# EAGLE board Tempura_V2_Gerber (EAGLE 9.6.1), part 1 of 2
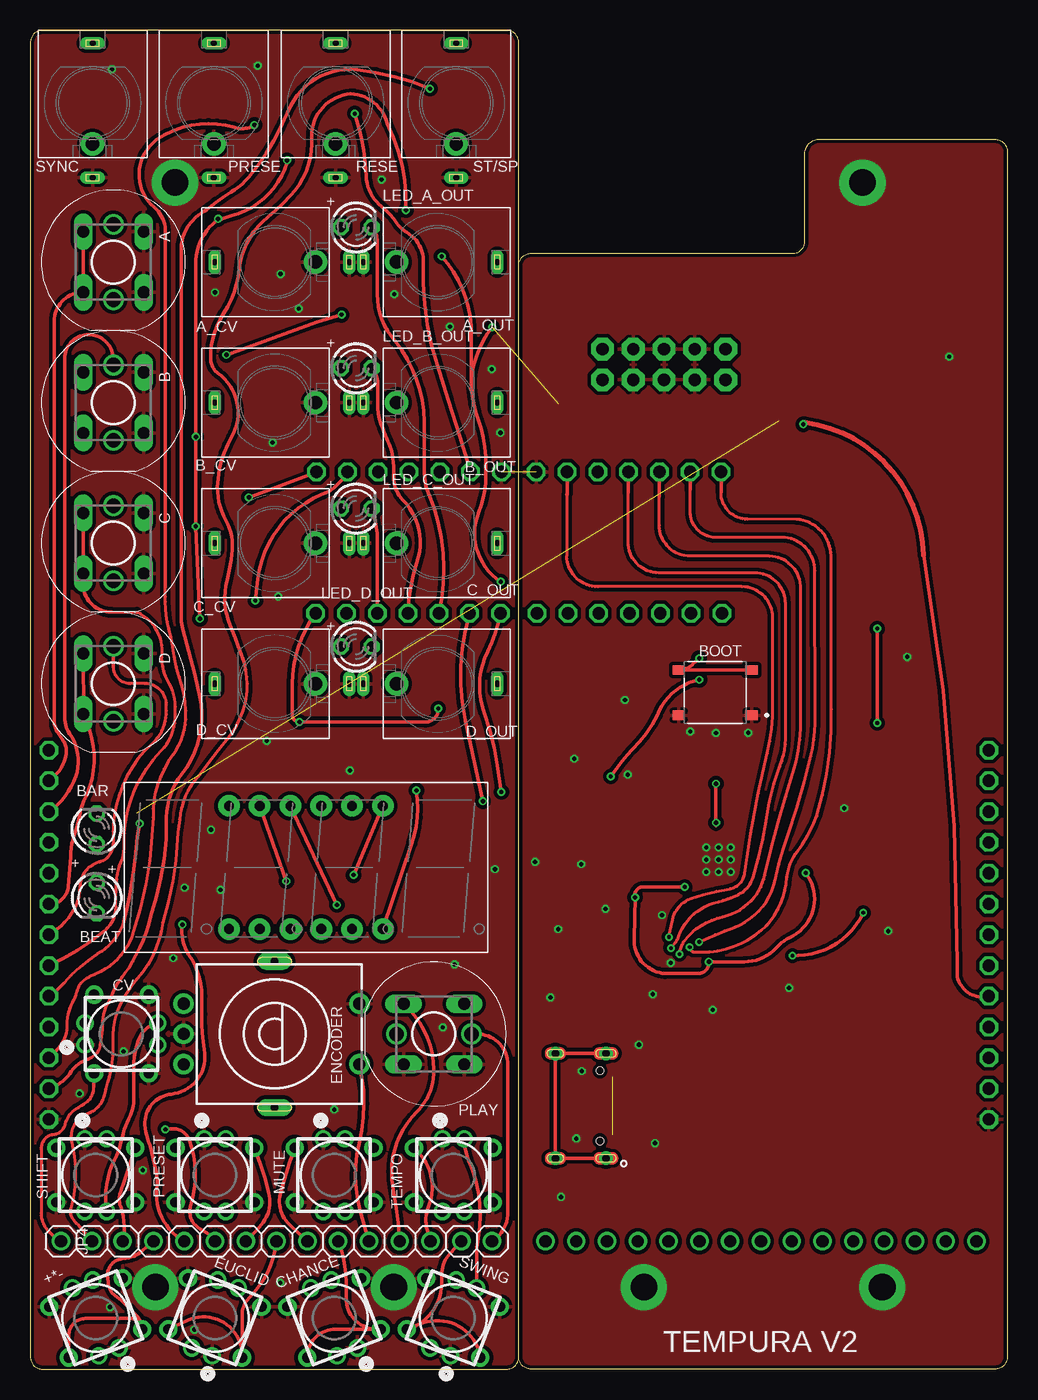
[diagram p0: board, top side]
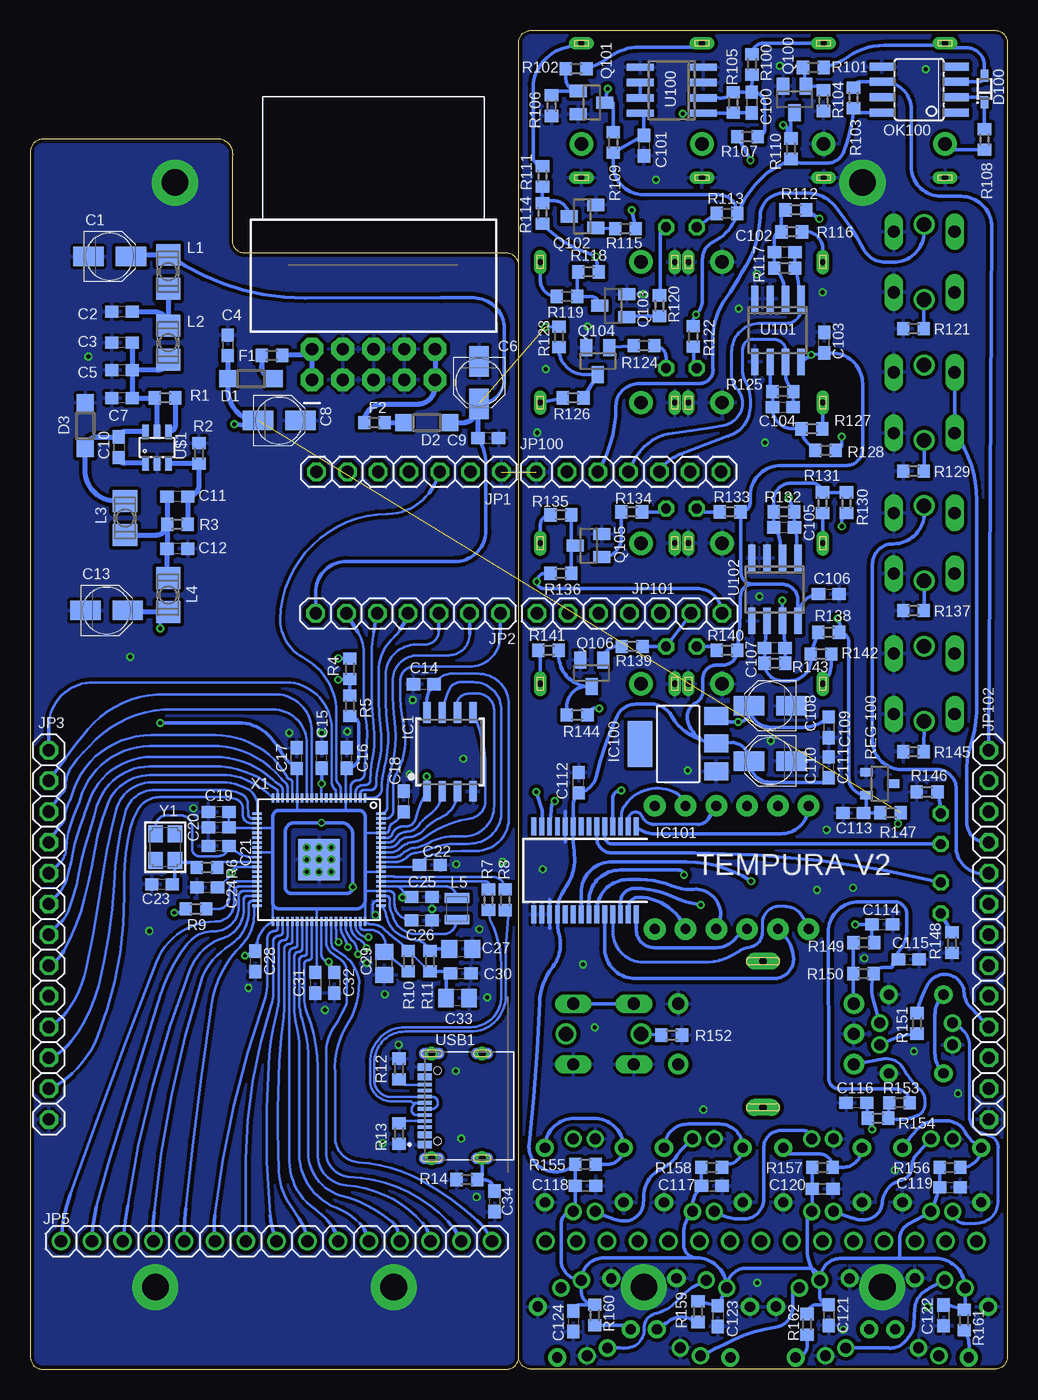
[diagram p1: board, bottom side, seen from below]

Size 80.6 x 110.5 mm. Coordinates in mm from the lower left corner, seen from the top.
Outline: 40.3,1 arc-90 39.3,0 1,0 arc-90 0,1 0,109.5 arc-90 1,110.5 39.3,110.5 arc-90 40.3,109.5 40.3,1
Outline: 40.3,1 arc90 41.3,0 79.6,0 arc90 80.6,1 80.6,100.5 arc90 79.6,101.5 64.9,101.5 arc90 63.9,99.99 63.9,93.09 arc-90 62.9,92.09 41.3,92.09 arc90 40.3,91.09 40.3,36.21 40.3,1
Copper layers (1*16): Top 0.035mm / dielectric 1.5mm / Bottom 0.035mm
Design rules "Covered_Vias": minimum track width 6mil, minimum drill 12mil, track to track 6mil, track to pad 6mil, pad to pad 6mil, via to via 6mil, smd to smd 0mil, copper to edge 10mil, drill to drill 10mil, minimum pad ring 10mil, minimum via ring 6mil, stop-mask expansion 2mil, vias tented up to drill 100mil, thermal gap 10mil

## Footprints (pad centres in the part's own frame; a part is rotated, then mirrored left to right if it is on the bottom)
BUTTON_PIXEL_ç = drill 0.85 pad 1.5: 1 -2.25,-3.25; 2 2.25,-3.25; 3 -2.25,3.25; 4 2.25,3.25 | drill 0.9 pad 1.422: DIN 3,-0.9; DOUT -3,0.9; GND -3,-0.9; VDD 3,0.9
TIMEBUTTON_HOLES_LEDS = drill 1 long: 1 -2.5,2.5; 2 2.5,2.5; 3 -2.5,-2.5; 4 2.5,-2.5 | drill 1.2: P$1 -3.1,0; P$2 3.1,0
NOHOLER_GND_SHORT_PADMINI_GND = drill 0.5 pad 1.016 long: P1 0,-6.15; P3 0,4.92 | drill 1.1 pad 1.93: P2 0,-3.38
LED3MM = drill 0.813 octagon: A -1.27,0; K 1.27,0
SW_TS-1187A-B-A-B = smd 1 x 0.75: A -3,1.875; B 3,1.875; C -3,-1.875; D 3,-1.875
PANASONIC_B = smd 2.5 x 1.6: + 1.75,0; - -1.75,0
C0603 = smd 1.1 x 1: 1 -0.85,0; 2 0.85,0
0603 = smd 1.1 x 1: 1 -0.85,0; 2 0.85,0
C0805 = smd 1.3 x 1.5: 1 -0.95,0; 2 0.95,0
SOD123 = smd 1.4 x 1.4: A 1.9,0; C -1.9,0
SOD323F = smd 1 x 0.6: A 1.1,0; C -1.1,0
CI-11 = drill 1 pad 1.676: A -2.5,-7.5; B 0,-7.5; C 2.5,-7.5; D -2.5,7; E 2.5,7 | drill 0.6 pad 1.422 long: C1 -6,0; C2 6.065,0
R0603 = smd 1 x 1.1: 1 -0.85,0; 2 0.85,0
SOIC-8 = smd 0.61 x 1.702: 1 -1.905,-3.251; 2 -0.635,-3.251; 3 0.635,-3.251; 4 1.905,-3.251; 5 1.905,3.251; 6 0.635,3.251; 7 -0.635,3.251; 8 -1.905,3.251
SOT223 = smd 1.499 x 2.007: 1 -2.261,-3.15; 2 0.025,-3.15; 3 2.311,-3.15 | smd 3.81 x 2.007: 4 0,3.15
SSOP28 = smd 0.4 x 1.5: 1 -4.225,-3.625; 2 -3.575,-3.625; 3 -2.925,-3.625; 4 -2.275,-3.625; 5 -1.625,-3.625; 6 -0.975,-3.625; 7 -0.325,-3.625; 8 0.325,-3.625; 9 0.975,-3.625; 10 1.625,-3.625; 11 2.275,-3.625; 12 2.925,-3.625; 13 3.575,-3.625; 14 4.225,-3.625; 15 4.225,3.625; 16 3.575,3.625; 17 2.925,3.625; 18 2.275,3.625; 19 1.625,3.625; 20 0.975,3.625; 21 0.325,3.625; 22 -0.325,3.625; 23 -0.975,3.625; 24 -1.625,3.625; 25 -2.275,3.625; 26 -2.925,3.625; 27 -3.575,3.625; 28 -4.225,3.625
1X07ç = drill 1.016 octagon: 1 -7.62,0; 2 -5.08,0; 3 -2.54,0; 4 0,0; 5 2.54,0; 6 5.08,0; 7 7.62,0
1X13ç = drill 1.016 octagon: 1 -13.97,0; 2 -11.43,0; 3 -8.89,0; 4 -6.35,0; 5 -3.81,0; 6 -1.27,0; 7 1.27,0; 8 3.81,0; 9 6.35,0; 10 8.89,0; 11 11.43,0; 12 13.97,0; 13 16.51,0
1X15ç = drill 1.016: 1 -17.78,0; 2 -15.24,0; 3 -12.7,0; 4 -10.16,0; 5 -7.62,0; 6 -5.08,0; 7 -2.54,0; 8 0,0; 9 2.54,0; 10 5.08,0; 11 7.62,0; 12 10.16,0; 13 12.7,0; 14 15.24,0; 15 17.78,0
L3225P = smd 1.8 x 2: 1 -1.4,0; 2 1.4,0
1008(2520) = smd 0.8 x 2: 1 -0.9,0; 2 0.9,0
7-SEGMENT-4DIGIT-30MM = drill 0.8 pad 1.778: 1 -6.35,-5.08; 2 -3.81,-5.08; 3 -1.27,-5.08; 4 1.27,-5.08; 5 3.81,-5.08; 6 6.35,-5.08; 7 6.35,5.08; 8 3.81,5.08; 9 1.27,5.08; 10 -1.27,5.08; 11 -3.81,5.08; 12 -6.35,5.08
SOIC08 = smd 0.66 x 2.032: 1 -1.905,-3.073; 2 -0.635,-3.073; 3 0.635,-3.073; 4 1.905,-3.073; 5 1.905,3.073; 6 0.635,3.073; 7 -0.635,3.073; 8 -1.905,3.073
2X5-POWER_ACODADO = drill 1.016 pad 1.88 octagon: 1 -1.27,5.08; 2 1.27,5.08; 3 -1.27,2.54; 4 1.27,2.54; 5 -1.27,0; 6 1.27,0; 7 -1.27,-2.54; 8 1.27,-2.54; 9 -1.27,-5.08; 10 1.27,-5.08
SOT23 = smd 1 x 1.4: 1 -0.95,-1.1; 2 0.95,-1.1; 3 0,1.1
DBZ_R-PDSO-G3 = smd 0.7 x 1: 1 -0.95,-1.1; 2 0.95,-1.1; 3 0,1.1
SO08 = smd 0.6 x 2.2: 1 -1.905,-2.6; 2 -0.635,-2.6; 3 0.635,-2.6; 4 1.905,-2.6; 5 1.905,2.6; 6 0.635,2.6; 7 -0.635,2.6; 8 -1.905,2.6
SOT23-6 = smd 0.55 x 1.2: 1 -0.95,-1.3; 2 0,-1.3; 3 0.95,-1.3; 4 0.95,1.3; 5 0,1.3; 6 -0.95,1.3
HRO_TYPE-C-31-M-12 = smd 0.6 x 1.14: A1_B12 -3.2,4.75; A4_B9 -2.4,4.75; B1_A12 3.2,4.75; B4_A9 2.4,4.75 | smd 0.3 x 1.14: A5 -1.25,4.75; A6 -0.25,4.75; A7 0.25,4.75; A8 1.25,4.75; B5 1.75,4.75; B6 0.75,4.75; B7 -0.75,4.75; B8 -1.75,4.75 | drill 0.6 pad 0.9: S1 -4.325,4.17; S2 4.325,4.17; S3 -4.325,0; S4 4.325,0 | hole 0.6: -2.89,3.68; 2.89,3.68
QFN80 = smd 0.78 x 0.22: 1 -5.09,3.8; 2 -5.09,3.4; 3 -5.09,3; 4 -5.09,2.6; 5 -5.09,2.2; 6 -5.09,1.8; 7 -5.09,1.4; 8 -5.09,1; 9 -5.09,0.6; 10 -5.09,0.2; 11 -5.09,-0.2; 12 -5.09,-0.6; 13 -5.09,-1; 14 -5.09,-1.4; 15 -5.09,-1.8; 16 -5.09,-2.2; 17 -5.09,-2.6; 18 -5.09,-3; 19 -5.09,-3.4; 20 -5.09,-3.8; 41 5.1,-3.8; 42 5.1,-3.4; 43 5.1,-3; 44 5.1,-2.6; 45 5.1,-2.2; 46 5.1,-1.8; 47 5.1,-1.4; 48 5.1,-1; 49 5.1,-0.6; 50 5.1,-0.2; 51 5.1,0.2; 52 5.1,0.6; 53 5.1,1; 54 5.1,1.4; 55 5.1,1.8; 56 5.1,2.2; 57 5.1,2.6; 58 5.1,3; 59 5.1,3.4; 60 5.1,3.8 | smd 0.22 x 0.78: 21 -3.8,-5.1; 22 -3.4,-5.1; 23 -3,-5.1; 24 -2.6,-5.1; 25 -2.2,-5.1; 26 -1.8,-5.1; 27 -1.4,-5.1; 28 -1,-5.1; 29 -0.6,-5.1; 30 -0.2,-5.1; 31 0.2,-5.1; 32 0.6,-5.1; 33 1,-5.1; 34 1.4,-5.1; 35 1.8,-5.1; 36 2.2,-5.1; 37 2.6,-5.1; 38 3,-5.1; 39 3.4,-5.1; 40 3.8,-5.1; 61 3.8,5.1; 62 3.4,5.1; 63 3,5.1; 64 2.6,5.1; 65 2.2,5.1; 66 1.8,5.1; 67 1.4,5.1; 68 1,5.1; 69 0.6,5.1; 70 0.2,5.1; 71 -0.2,5.1; 72 -0.6,5.1; 73 -1,5.1; 74 -1.4,5.1; 75 -1.8,5.1; 76 -2.2,5.1; 77 -2.6,5.1; 78 -3,5.1; 79 -3.4,5.1; 80 -3.8,5.1 | smd 3.4 x 3.4: MNT 0,0
CRYSTAL_3.2X2.5 = smd 1.4 x 1.2: 1 -1.1,-0.8; 2 1.1,0.8; GND1 -1.1,0.8; GND2 1.1,-0.8

## Placement (x,y rotation side)
+*-  BUTTON_NEOPIXELBUTTON_PIXEL_ç  [BUTTON_PIXEL_ç]  5.4,4.23 111.1 top
A  DTS-6_LED  [TIMEBUTTON_HOLES_LEDS]  6.85,91.37 270 top
A_CV  OG-PJ301_PJ301_THONKICONNNOHOLER  [NOHOLER_GND_SHORT_PADMINI_GND]  20.15,91.37 90 top
A_OUT  OG-PJ301_PJ301_THONKICONNNOHOLER  [NOHOLER_GND_SHORT_PADMINI_GND]  33.6,91.37 270 top
B  DTS-6_LED  [TIMEBUTTON_HOLES_LEDS]  6.85,79.77 270 top
B_CV  OG-PJ301_PJ301_THONKICONNNOHOLER  [NOHOLER_GND_SHORT_PADMINI_GND]  20.15,79.77 90 top
B_OUT  OG-PJ301_PJ301_THONKICONNNOHOLER  [NOHOLER_GND_SHORT_PADMINI_GND]  33.6,79.77 270 top
BAR  OSG5TA7NE4B  [LED3MM]  5.48,44.6 90 top
BEAT  OSO5JA7NE4B  [LED3MM]  5.48,38.89 270 top
BOOT  TS-1187A-B-A-B  [SW_TS-1187A-B-A-B]  56.5,55.85 180 top
C  DTS-6_LED  [TIMEBUTTON_HOLES_LEDS]  6.85,68.17 270 top
C1  10uF  [PANASONIC_B]  74.05,91.84 0 bottom
C2  10n  [C0603]  73.04,87.27 180 bottom
C3  100n  [C0603]  73.04,84.73 180 bottom
C4  100n  [C0603]  64.32,84.5 270 bottom
C5  10uF  [C0603]  73.04,82.44 180 bottom
C6  10uF  [PANASONIC_B]  43.57,81.42 270 bottom
C7  100n  [C0603]  73.04,80.15 180 bottom
C8  10uF  [PANASONIC_B]  60.06,78.3 0 bottom
C9  100n  [C0603]  42.81,76.85 0 bottom
C10  100n  [C0603]  73.29,76.09 270 bottom
C11  100n  [C0603]  68.46,72.03 180 bottom
C12  22uF  [C0603]  68.46,67.71 180 bottom
C13  10uF  [PANASONIC_B]  74.31,62.63 0 bottom
C14  100n  [0603]  48.14,56.53 180 bottom
C15  100n  [0603]  56.55,50.44 90 bottom
C16  100n  [0603]  54.49,50.44 90 bottom
C17  100n  [0603]  58.63,50.43 90 bottom
C18  100n  [0603]  49.79,46.84 90 bottom
C19  100n  [0603]  65.06,45.99 180 bottom
C20  100n  [0603]  65.06,44.72 180 bottom
C21  15pF  [0603]  65.06,43.2 180 bottom
C22  100n  [C0603]  47.63,41.62 0 bottom
C23  15pF  [0603]  69.73,40.02 180 bottom
C24  4.7uF  [0603]  66,39.77 180 bottom
C25  4.7uF  [0603]  48.3,38.98 0 bottom
C26  4.7uF  [C0603]  48.3,37.02 180 bottom
C27  4.7uF  [C0805]  45.1,34.69 180 bottom
C28  100n  [0603]  62.04,33.66 270 bottom
C29  4.7uF  [C0805]  51.4,33.49 90 bottom
C30  100n  [0603]  45.1,32.66 0 bottom
C31  100n  [0603]  57.08,31.89 270 bottom
C32  100n  [0603]  55.51,31.89 270 bottom
C33  4.7uF  [C0805]  45.35,30.62 180 bottom
C34  10n  [C0603]  42.3,13.86 270 bottom
C100  100pF  [C0603]  21.08,104.54 270 bottom
C101  100n  [C0603]  29.97,100.98 270 bottom
C102  100pF  [C0603]  18.36,92.19 0 bottom
C103  100n  [C0603]  15.11,84.73 90 bottom
C104  100pF  [C0603]  18.52,79.39 0 bottom
C105  100pF  [C0603]  18.41,69.49 0 bottom
C106  100n  [C0603]  14.73,63.97 0 bottom
C107  100pF  [C0603]  19.18,59.53 0 bottom
C108  10uF  [PANASONIC_B]  19.56,54.75 180 bottom
C109  100n  [C0603]  14.73,52.98 270 bottom
C110  10uF  [PANASONIC_B]  19.56,50.18 180 bottom
C111  100n  [C0603]  14.73,49.67 90 bottom
C112  100n  [C0603]  35.36,48.4 90 bottom
C113  100nF  [C0603]  12.7,45.91 0 bottom
C114  100nF  [C0603]  10.31,36.69 180 bottom
C115  100n  [C0603]  8.13,33.82 0 bottom
C116  100nF  [C0603]  12.45,21.99 180 bottom
C117  100n  [C0603]  24.38,15.13 0 bottom
C118  100n  [C0603]  34.8,15.13 0 bottom
C119  100n  [C0603]  4.72,15 0 bottom
C120  100n  [C0603]  15.24,14.88 0 bottom
C121  100n  [C0603]  14.73,4.46 270 bottom
C122  100n  [C0603]  5.26,4.44 270 bottom
C123  100n  [C0603]  23.88,4.39 270 bottom
C124  100n  [C0603]  35.81,3.95 270 bottom
C_CV  OG-PJ301_PJ301_THONKICONNNOHOLER  [NOHOLER_GND_SHORT_PADMINI_GND]  20.15,68.17 90 top
C_OUT  OG-PJ301_PJ301_THONKICONNNOHOLER  [NOHOLER_GND_SHORT_PADMINI_GND]  33.6,68.17 270 top
CHANCE  BUTTON_NEOPIXELBUTTON_PIXEL_ç  [BUTTON_PIXEL_ç]  25.07,4.23 111.1 top
CV  BUTTON_NEOPIXELBUTTON_PIXEL_ç  [BUTTON_PIXEL_ç]  7.52,27.67 0 top
D  DTS-6_LED  [TIMEBUTTON_HOLES_LEDS]  6.85,56.57 270 top
D1  SS1040_R1_00001  [SOD123]  62.39,81.75 180 bottom
D2  SS1040_R1_00001  [SOD123]  47.89,78.12 180 bottom
D3  SS1040_R1_00001  [SOD123]  76.08,77.87 90 bottom
D100  1N4148WS  [SOD323F]  1.88,105.66 90 bottom
D_CV  OG-PJ301_PJ301_THONKICONNNOHOLER  [NOHOLER_GND_SHORT_PADMINI_GND]  20.15,56.57 90 top
D_OUT  OG-PJ301_PJ301_THONKICONNNOHOLER  [NOHOLER_GND_SHORT_PADMINI_GND]  33.6,56.57 270 top
ENCODER  CI-11  [CI-11]  20.15,27.67 270 top
EUCLID  BUTTON_NEOPIXELBUTTON_PIXEL_ç  [BUTTON_PIXEL_ç]  15.23,4.23 69 top
F1  F2  [R0603]  60.67,83.68 0 bottom
F2  F1  [R0603]  52.21,78.12 180 bottom
IC1  W25Q128JVSIQ  [SOIC-8]  45.98,50.94 0 bottom
IC100  LM1117-3.3  [SOT223]  27.15,51.6 90 bottom
IC101  MCP23017SS  [SSOP28]  34.84,41.16 180 bottom
JP1  [1X07ç]  49.36,74.06 180 bottom
JP2  [1X07ç]  49.43,62.37 180 bottom
JP3  [1X13ç]  79.08,37.13 270 bottom
JP4  [1X15ç]  20.32,10.56 0 top
JP5  [1X15ç]  60.28,10.56 0 bottom
JP100  [1X07ç]  31.24,74.06 0 bottom
JP101  [1X07ç]  31.17,62.37 0 bottom
JP102  [1X13ç]  1.52,37.13 270 bottom
L1  0.1uH  [L3225P]  69.23,90.57 270 bottom
L2  0.1uH  [L3225P]  69.23,84.73 270 bottom
L3  4.7uH  [L3225P]  72.78,70.25 270 bottom
L4  0.1uH  [L3225P]  69.23,63.9 270 bottom
L5  3.3μH  [1008(2520)]  45.4,37.99 270 bottom
LED_A_OUT  2 MM LED  [LED3MM]  26.88,94.24 0 top
LED_B_OUT  2 MM LED  [LED3MM]  26.88,82.62 0 top
LED_C_OUT  2 MM LED  [LED3MM]  26.88,71.04 0 top
LED_D_OUT  2 MM LED  [LED3MM]  26.88,59.64 0 top
LFD36BUE-101B  7-SEGMENT-4DIGIT-20MM  [7-SEGMENT-4DIGIT-30MM]  22.73,41.41 0 top
MUTE  BUTTON_NEOPIXELBUTTON_PIXEL_ç  [BUTTON_PIXEL_ç]  25.07,16.02 270 top
OK100  HCPL0700  [SOIC08]  7.26,105.6 90 bottom
PLAY  DTS-6_LED  [TIMEBUTTON_HOLES_LEDS]  33.3,27.67 180 top
POWER  M05X2RAF  [2X5-POWER_ACODADO]  52.28,82.92 90 bottom
PRESE  OG-PJ301_PJ301_THONKICONNNOHOLER  [NOHOLER_GND_SHORT_PADMINI_GND]  15.15,104.5 0 top
PRESET  BUTTON_NEOPIXELBUTTON_PIXEL_ç  [BUTTON_PIXEL_ç]  15.23,16.02 270 top
Q100  BC846  [SOT23]  17.55,104.79 180 bottom
Q101  BC846  [SOT23]  34.29,104.54 270 bottom
Q102  BC846  [SOT23]  35.05,95.14 90 bottom
Q103  BC846  [SOT23]  32.51,87.77 90 bottom
Q104  BC846  [SOT23]  33.78,83.2 180 bottom
Q105  BC846  [SOT23]  34.54,67.96 90 bottom
Q106  BC846  [SOT23]  34.29,57.45 180 bottom
R1  100k  [R0603]  69.48,80.15 0 bottom
R2  16k2  [R0603]  66.69,75.58 270 bottom
R3  49k9  [R0603]  68.46,69.74 0 bottom
R4  1k  [R0603]  54.24,57.8 90 bottom
R5  10k  [R0603]  54.24,54.75 270 bottom
R6  1K  [R0603]  66.02,41.41 180 bottom
R7  27 Ohm  [R0603]  42.81,38.75 90 bottom
R8  27 Ohm  [R0603]  41.41,38.74 90 bottom
R9  10K  [R0603]  66.94,37.99 180 bottom
R10  200 Ohm  [R0603]  49.41,33.67 90 bottom
R11  33 Ohm  [R0603]  47.64,33.67 270 bottom
R12  5.1K  [R0603]  50.18,24.78 270 bottom
R13  5.1K  [R0603]  50.18,19.45 270 bottom
R14  1M  [R0603]  44.59,15.64 0 bottom
R100  100k  [R0603]  21.06,107.69 90 bottom
R101  100k  [R0603]  16,107.43 0 bottom
R102  100k  [R0603]  35.56,107.33 0 bottom
R103  270 Ohm  [R0603]  12.67,104.92 270 bottom
R104  1M  [R0603]  15.16,104.69 90 bottom
R105  22k  [R0603]  22.61,104.54 90 bottom
R106  1M  [R0603]  37.59,104.28 90 bottom
R107  100k  [R0603]  21.44,101.72 180 bottom
R108  220 Ohm  [R0603]  1.88,101.49 270 bottom
R109  10k  [R0603]  32.51,101.24 270 bottom
R110  10k  [R0603]  17.86,100.73 270 bottom
R111  100 Ohm  [R0603]  38.35,98.44 90 bottom
R112  100k  [R0603]  17.45,95.67 0 bottom
R113  470 Ohm  [R0603]  23.11,95.39 180 bottom
R114  1k  [R0603]  38.35,95.39 90 bottom
R115  1k  [R0603]  31.5,94.12 0 bottom
R116  100k  [R0603]  17.78,93.87 0 bottom
R117  22k  [R0603]  18.36,90.87 180 bottom
R118  1k  [R0603]  34.54,90.57 180 bottom
R119  100 Ohm  [R0603]  36.32,88.54 180 bottom
R120  1k  [R0603]  28.7,87.77 90 bottom
R121  100 Ohm  [R0603]  7.73,85.88 180 bottom
R122  470 Ohm  [R0603]  25.91,85.23 270 bottom
R123  1k  [R0603]  36.99,85.2 270 bottom
R124  1k  [R0603]  29.97,84.47 0 bottom
R125  22k  [R0603]  18.52,80.69 180 bottom
R126  100 Ohm  [R0603]  35.81,80.15 180 bottom
R127  100k  [R0603]  16.13,77.61 0 bottom
R128  100k  [R0603]  14.99,75.84 0 bottom
R129  100 Ohm  [R0603]  7.73,74.12 180 bottom
R130  100k  [R0603]  13.26,71.52 270 bottom
R131  100k  [R0603]  15.24,71.52 270 bottom
R132  22k  [R0603]  18.41,70.76 180 bottom
R133  470 Ohm  [R0603]  22.86,70.76 180 bottom
R134  1k  [R0603]  30.99,70.76 0 bottom
R135  100 Ohm  [R0603]  36.83,70.5 180 bottom
R136  1k  [R0603]  36.83,65.68 0 bottom
R137  100 Ohm  [R0603]  7.73,62.61 180 bottom
R138  100k  [R0603]  14.73,60.82 0 bottom
R139  1k  [R0603]  30.94,59.65 0 bottom
R140  470 Ohm  [R0603]  23.11,59.33 180 bottom
R141  100 Ohm  [R0603]  37.85,59.33 180 bottom
R142  100k  [R0603]  15.37,59.02 0 bottom
R143  22k  [R0603]  19.18,58.26 180 bottom
R144  1k  [R0603]  35.48,53.99 180 bottom
R145  100 Ohm  [R0603]  7.73,50.97 180 bottom
R146  1k  [R0603]  6.6,47.64 0 bottom
R147  1k  [R0603]  9.63,45.91 0 bottom
R148  1k  [R0603]  4.57,35.2 90 bottom
R149  10k  [R0603]  11.84,35.2 0 bottom
R150  10k  [R0603]  11.86,32.66 180 bottom
R151  560 Ohm  [R0603]  7.44,28.54 270 bottom
R152  100 Ohm  [R0603]  27.69,27.58 0 bottom
R153  10k  [R0603]  8.89,21.99 180 bottom
R154  10k  [R0603]  10.67,20.72 0 bottom
R155  2k2  [R0603]  34.8,16.91 180 bottom
R156  2k2  [R0603]  4.72,16.65 180 bottom
R157  2k2  [R0603]  15.24,16.65 180 bottom
R158  2k2  [R0603]  24.38,16.65 180 bottom
R159  2k2  [R0603]  25.53,4.74 90 bottom
R160  2k2  [R0603]  34.04,4.46 90 bottom
R161  2k2  [R0603]  3.56,4.06 90 bottom
R162  2k2  [R0603]  16.51,3.7 90 bottom
REG-100  LM4040C10ILP  [DBZ_R-PDSO-G3]  10.52,48.33 270 bottom
RESE  OG-PJ301_PJ301_THONKICONNNOHOLER  [NOHOLER_GND_SHORT_PADMINI_GND]  25.18,104.5 0 top
SHIFT  BUTTON_NEOPIXELBUTTON_PIXEL_ç  [BUTTON_PIXEL_ç]  5.4,16.02 270 top
ST/SP  OG-PJ301_PJ301_THONKICONNNOHOLER  [NOHOLER_GND_SHORT_PADMINI_GND]  35.13,104.5 0 top
SWING  BUTTON_NEOPIXELBUTTON_PIXEL_ç  [BUTTON_PIXEL_ç]  34.9,4.23 69 top
SYNC  OG-PJ301_PJ301_THONKICONNNOHOLER  [NOHOLER_GND_SHORT_PADMINI_GND]  5.14,104.5 0 top
TEMPO  BUTTON_NEOPIXELBUTTON_PIXEL_ç  [BUTTON_PIXEL_ç]  34.9,16.02 270 top
U100  MCP6002_  [SO08]  27.69,105.55 90 bottom
U101  MCP6002_  [SO08]  18.92,85.74 180 bottom
U102  MCP6002_  [SO08]  19.18,64.36 180 bottom
U$1  BL9342  [SOT23-6]  70.14,76.07 0 bottom
USB1  TYPE-C-31-M-12  [HRO_TYPE-C-31-M-12]  43.32,21.73 90 bottom
X1  RP2350B  [QFN80]  56.78,42.05 270 bottom
Y1  12MHZ  [CRYSTAL_3.2X2.5]  69.48,43.07 270 bottom

## Library data of the parts
+*- A B C CHANCE CV D EUCLID MUTE PLAY PRESET SHIFT SWING TEMPO = switch-tact
A_CV A_OUT B_CV B_OUT C_CV C_OUT D_CV D_OUT PRESE RESE ST/SP SYNC = Thonkikonn
BAR BEAT LED_A_OUT LED_B_OUT LED_C_OUT LED_D_OUT = led
BOOT = TS-1187A-B-A-B; AVAILABILITY: Not in stock; CHECK_PRICES: https://www.snapeda.com/parts/TS-1187A-B-A-B/XKB+Connection/view-part/?ref=eda; DESCRIPTION: TS-1187A-B-A-B XKB Connectivity; MF: XKB Industrial Precision; MP: TS-1187A-B-A-B; PACKAGE: Package; PRICE: None; SNAPEDA_LINK: https://www.snapeda.com/parts/TS-1187A-B-A-B/XKB+Connection/view-part/?ref=snap
C1-C13 C22 C26 C27 C29 C33 C34 C101 C103 C106 C108-C112 C115 C117-C124 F1 F2 L1-L4 R1-R14 R100-R102 R104-R107 R109-R148 R151 R152 = rcl
C14-C21 C23 C28 C30-C32 = SparkFun-Capacitors; PROD_ID: CAP-08390
C24 C25 = SparkFun-Capacitors; PROD_ID: CAP-11015
C100 C102 C104 C105 C107 C113 C114 C116 = rcl; SPICEPREFIX: C
D1-D3 = diode
D100 = _hhn_diodes_smd
ENCODER = piher
IC1 = SparkFun-IC-Memory
IC100 = og-vreg
IC101 U$1 = adafruit
JP1-JP5 JP100-JP102 = pinhead
L5 = SparkFun-Coils; PROD_ID: NDUC-14880
LFD36BUE-101B = SparkFun-LED
OK100 = optocoupler-2(1)
POWER = SparkFun
Q100-Q106 = transistor
R103 R108 R149 R150 R153-R162 = rcl; SPICEPREFIX: R
REG-100 = texas; MPN: LM4041A12IDBZR; OC_FARNELL: 1407949; OC_NEWARK: 58K5875
U100-U102 = MTM
USB1 = USB-TYPE-C-31-M-12; AVAILABILITY: Not in stock; CHECK_PRICES: https://www.snapeda.com/parts/TYPE-C-31-M-12/HRO+Electronics+Co.%252C+Ltd./view-part/?ref=eda; DESCRIPTION: USB Connectors 24 Receptacle 1 8.94*7.3mm RoHS; MF: HRO Electronics Co., Ltd.; MP: TYPE-C-31-M-12; PACKAGE: Package; PRICE: None; SNAPEDA_LINK: https://www.snapeda.com/parts/TYPE-C-31-M-12/HRO+Electronics+Co.%252C+Ltd./view-part/?ref=snap
X1 = adafruit_micro
Y1 = microbuilder

## Nets
1.1V: C15.1 C24.1 C25.1 C32.1 L5.1 X1.10 X1.32 X1.51 X1.65
!RESET: R9.1 X1.35
+3V3: +*-.VDD C101.1 C103.1 C106.1 C110.+ C111.1 C112.1 C115.1 C117.1 C118.1 C119.1 C120.1 C121.1 C122.1 C123.1 C124.1 CHANCE.VDD CV.VDD EUCLID.VDD IC100.2 IC101.9 IC101.18 MUTE.VDD OK100.8 PRESET.VDD R103.2 R109.2 R110.2 R113.1 R122.1 R133.1 R140.1 R150.1 R153.1 R155.2 R156.2 R157.2 R158.2 R159.2 R160.2 R161.2 R162.2 SHIFT.VDD SWING.VDD TEMPO.VDD U100.8 U101.8 U102.8
+12V: C1.+ C6.+ C9.1 C108.+ C109.1 D2.C IC100.3 JP2.7 JP101.7 L1.1 R114.1 R118.1 R123.1 R136.1 R144.1
+*-_B: JP5.4 X1.39
+*-_T: +*-.1 +*-.3 JP4.4 R161.1
-10V: C113.2 R107.2 R112.2 R128.2 R130.2 R138.2 R147.1 REG-100.2
-12V: C4.2 C8.- D1.A JP3.9 JP102.9 R147.2
A_B: JP3.2 X1.12
A_CV_B: JP1.4 X1.57
A_CV_T: C102.2 JP100.4 R117.1 U101.1
A_OUT_B: JP2.3 X1.1
A_OUT_T: JP101.3 LED_A_OUT.K R120.2
A_T: A.3 A.4 JP102.2
ADC_AVDD: C29.2 R10.1 X1.59
B_B: JP3.4 X1.16
B_CV_B: JP1.5 X1.56
B_CV_T: C104.2 JP100.5 R125.1 U101.7
B_OUT_B: JP2.4 X1.2
B_OUT_T: JP101.4 LED_B_OUT.K R124.2
B_T: B.3 B.4 JP102.4
C_B: JP3.8 X1.20
C_CV_B: JP1.7 X1.55
C_CV_T: C105.2 JP100.7 R132.1 U102.1
C_OUT_B: JP2.5 X1.3
C_OUT_T: JP101.5 LED_C_OUT.K R134.2
C_T: C.3 C.4 JP102.8
CHANCE_B: JP5.10 X1.46
CHANCE_T: CHANCE.1 CHANCE.3 JP4.10 R159.1
CV_B: JP5.1 X1.36
CV_T: CV.1 CV.3 JP4.1
D_B: JP3.6 X1.18
D_CV_B: JP1.6 X1.54
D_CV_T: C107.2 JP100.6 R143.1 U102.7
D_N: R7.1 USB1.A7 USB1.B7
D_OUT_B: JP2.6 X1.4
D_OUT_T: JP101.6 LED_D_OUT.K R139.2
D_P: R8.1 USB1.A6 USB1.B6
D_T: D.3 D.4 JP102.6
DO_N: R7.2 X1.66
DO_P: R8.2 X1.67
ENC_A_B: JP5.6 X1.42
ENC_A_T: C116.1 JP4.6 R154.1
ENC_B_B: JP5.5 X1.40
ENC_B_T: C114.2 JP4.5 R149.2
ENC_SW_B: JP5.11 X1.47
ENC_SW_T: ENCODER.E JP4.11
EUCLID_B: JP5.8 X1.44
EUCLID_T: EUCLID.1 EUCLID.3 JP4.8 R162.1
FLASH_!CS!/BOOT: IC1.1 R4.1 R5.1 X1.75
GND: +*-.2 +*-.4 +*-.GND A.1 A.2 A_CV.P1 A_CV.P2 A_OUT.P1 B.1 B.2 B_CV.P1 B_CV.P2 B_OUT.P1 BOOT.A BOOT.B C1.- C2.2 C3.2 C4.1 C5.2 C6.- C7.2 C8.+ C9.2 C12.1 C13.- C14.2 C15.2 C16.2 C17.2 C18.2 C19.2 C20.2 C21.2 C22.2 C23.2 C24.2 C25.2 C26.1 C27.1 C28.2 C29.1 C30.2 C31.2 C32.2 C33.1 C34.2 C101.2 C103.2 C106.2 C108.- C109.2 C110.- C111.2 C112.2 C113.1 C114.1 C115.2 C116.2 C117.2 C118.2 C119.2 C120.2 C121.2 C122.2 C123.2 C124.2 C.1 C.2 C_CV.P1 C_CV.P2 C_OUT.P1 CHANCE.2 CHANCE.4 CHANCE.GND CV.2 CV.4 CV.GND D3.A D.1 D.2 D_CV.P1 D_CV.P2 D_OUT.P1 ENCODER.B ENCODER.D EUCLID.2 EUCLID.4 EUCLID.GND IC1.4 IC100.1 IC101.10 IC101.15 IC101.16 IC101.17 JP1.1 JP3.13 JP100.1 JP102.13 MUTE.2 MUTE.4 MUTE.GND OK100.5 PLAY.1 PLAY.2 POWER.3 POWER.4 POWER.5 POWER.6 POWER.7 POWER.8 PRESE.P1 PRESE.P2 PRESET.2 PRESET.4 PRESET.GND Q100.2 Q101.2 Q102.2 Q103.2 Q104.2 Q105.2 Q106.2 R2.1 R12.1 R13.2 R14.1 R104.1 R106.1 R121.2 R129.2 R137.2 R145.2 R146.1 R148.1 R152.2 REG-100.1 RESE.P1 SHIFT.2 SHIFT.4 SHIFT.GND ST/SP.P1 SWING.2 SWING.4 SWING.GND SYNC.P1 TEMPO.2 TEMPO.4 TEMPO.GND U100.3 U100.4 U100.5 U101.3 U101.4 U101.5 U102.3 U102.4 U102.5 U$1.2 USB1.A1_B12 USB1.B1_A12 X1.62 X1.MNT
I2C0_SCL_B: JP2.2 X1.80
I2C0_SCL_T: IC101.12 JP101.2
I2C0_SDA_B: JP2.1 X1.79
I2C0_SDA_T: IC101.13 JP101.1
LA_B: JP1.3 X1.6
LA_T: A.P$1 JP100.3
LB_B: JP3.3 X1.13
LB_T: B.P$1 JP102.3
LC_B: JP3.5 X1.17
LC_T: C.P$1 JP102.5
LD_B: JP3.7 X1.19
LD_T: D.P$1 JP102.7
LPLAY_B: JP5.15 X1.53
LPLAY_T: JP4.15 PLAY.P$1
LX: L5.2 X1.63
MIDI_IN_B: JP3.1 X1.7
MIDI_IN_T: JP102.1 OK100.6 R103.1
MUTE_B: JP5.9 X1.45
MUTE_T: JP4.9 MUTE.1 MUTE.3 R158.1
N$4: R1.2 U$1.4
N$5: C3.1 C5.1 C7.1 L2.2 R1.1 U$1.5
N$6: C2.1 L1.2 L2.1
N$7: C10.2 U$1.1
N$8: C10.1 D3.C L3.1 U$1.6
N$9: C11.1 R2.2 R3.2 U$1.3
N$10: C11.2 C12.2 L3.2 L4.1 R3.1
N$11: IC101.21 LFD36BUE-101B.11
N$13: BAR.A IC101.5
N$15: D100.C OK100.2 R108.1
N$16: IC101.22 LFD36BUE-101B.7
N$18: IC101.23 LFD36BUE-101B.4
N$19: IC101.24 LFD36BUE-101B.2
N$20: IC101.25 LFD36BUE-101B.1
N$21: IC101.26 LFD36BUE-101B.10
N$22: IC101.27 LFD36BUE-101B.5
N$23: IC101.28 LFD36BUE-101B.3
N$24: IC101.1 LFD36BUE-101B.12
N$25: IC101.2 LFD36BUE-101B.9
N$26: IC101.3 LFD36BUE-101B.8
N$27: IC101.4 LFD36BUE-101B.6
N$28: C102.1 R112.1 R116.1 R117.2 U101.2
N$29: CV.DIN R151.2
N$30: CV.DOUT SHIFT.DIN
N$31: PRESET.DIN SHIFT.DOUT
N$32: MUTE.DIN PRESET.DOUT
N$33: MUTE.DOUT TEMPO.DIN
N$34: CHANCE.DOUT EUCLID.DIN
N$35: +*-.DIN EUCLID.DOUT
N$36: U100.6 U100.7
N$37: C104.1 R125.2 R127.1 R128.1 U101.6
N$38: C105.1 R130.1 R131.1 R132.2 U102.2
N$39: C107.1 R138.1 R142.1 R143.2 U102.6
N$40: PLAY.P$2 R152.1
N$41: A.P$2 R121.1
N$42: B.P$2 R129.1
N$43: F2.2 POWER.9 POWER.10
N$44: D2.A F2.1
N$45: F1.2 POWER.1 POWER.2
N$46: D1.C F1.1
N$47: C.P$2 R137.1
N$48: D.P$2 R145.1
N$49: A_OUT.P3 R119.2
N$50: B_OUT.P3 R126.2
N$51: Q100.1 R101.1 R104.2
N$52: C_OUT.P3 R135.2
N$53: Q101.1 R102.1 R106.2
N$54: D_OUT.P3 R141.2
N$55: Q102.1 R115.1
N$56: A_CV.P3 R116.2
N$57: B_CV.P3 R127.2
N$58: C_CV.P3 R131.2
N$59: D_CV.P3 R142.2
N$60: R111.2 ST/SP.P3
N$61: Q102.3 R111.1 R114.2
N$62: D100.A OK100.3 R101.2 SYNC.P3
N$63: PRESE.P3 R100.2
N$64: R102.2 RESE.P3
N$65: ENCODER.A R149.1 R150.2
N$66: ENCODER.C R153.2 R154.2
N$67: BAR.K R146.2
N$68: BEAT.A IC101.6
N$69: BEAT.K R148.2
N$71: CHANCE.DIN SWING.DOUT
N$72: C100.1 R100.1 R105.2 R107.1 U100.2
N$75: Q103.1 R120.1
N$76: Q103.3 R118.2 R119.1
N$77: LED_A_OUT.A R113.2
N$78: R108.2 SYNC.P2
N$79: Q104.1 R124.1
N$80: Q104.3 R123.2 R126.1
N$81: LED_B_OUT.A R122.2
N$83: Q105.1 R134.1
N$84: Q105.3 R135.1 R136.2
N$85: LED_C_OUT.A R133.2
N$87: Q106.1 R139.1
N$88: Q106.3 R141.1 R144.2
N$89: LED_D_OUT.A R140.2
N$95: SWING.DIN TEMPO.DOUT
N$111: C23.1 R6.2 Y1.2
N$112: BOOT.C BOOT.D R4.2
N$113: C34.1 R14.2 USB1.S1 USB1.S2 USB1.S3 USB1.S4
N$114: R13.1 USB1.A5
N$115: R12.2 USB1.B5
NEO_B: JP3.10 X1.21
NEO_T: JP102.10 R151.1
PLAY_B: JP5.12 X1.48
PLAY_T: JP4.12 PLAY.3 PLAY.4
PRESE_CV_B: JP1.2 X1.58
PRESE_CV_T: C100.2 JP100.2 R105.1 U100.1
PRESET_B: JP5.7 X1.43
PRESET_T: JP4.7 PRESET.1 PRESET.3 R157.1
QSPI-0: IC1.5 X1.72
QSPI-1: IC1.2 X1.74
QSPI-2: IC1.3 X1.73
QSPI-3: IC1.7 X1.70
QSPI-CLK: IC1.6 X1.71
RESE_CV_B: JP3.12 X1.23
RESE_CV_T: JP102.12 Q101.3 R109.1
SHIFT_B: JP5.3 X1.38
SHIFT_T: JP4.3 R156.1 SHIFT.1 SHIFT.3
ST/SP_B: JP5.2 X1.37
ST/SP_T: JP4.2 R115.2
SWING_B: JP5.14 X1.52
SWING_T: JP4.14 R160.1 SWING.1 SWING.3
SYNC_CV_B: JP3.11 X1.22
SYNC_CV_T: JP102.11 Q100.3 R110.1
TEMP_B: JP5.13 X1.49
TEMP_T: JP4.13 R155.1 TEMPO.1 TEMPO.3
VBUS: USB1.A4_B9 USB1.B4_A9
VCC: C13.+ C14.1 C16.1 C17.1 C18.1 C19.1 C20.1 C22.1 C26.2 C28.1 C30.1 C31.1 C33.2 IC1.8 L4.2 R5.2 R9.2 R10.2 R11.2 X1.5 X1.15 X1.24 X1.29 X1.41 X1.50 X1.60 X1.64 X1.68 X1.69 X1.76
VREG_AVDD: C27.2 R11.1 X1.61
XIN: C21.1 X1.30 Y1.1
XOUT: R6.1 X1.31